# EAGLE board Guitar Amp (EAGLE 9.6.2)
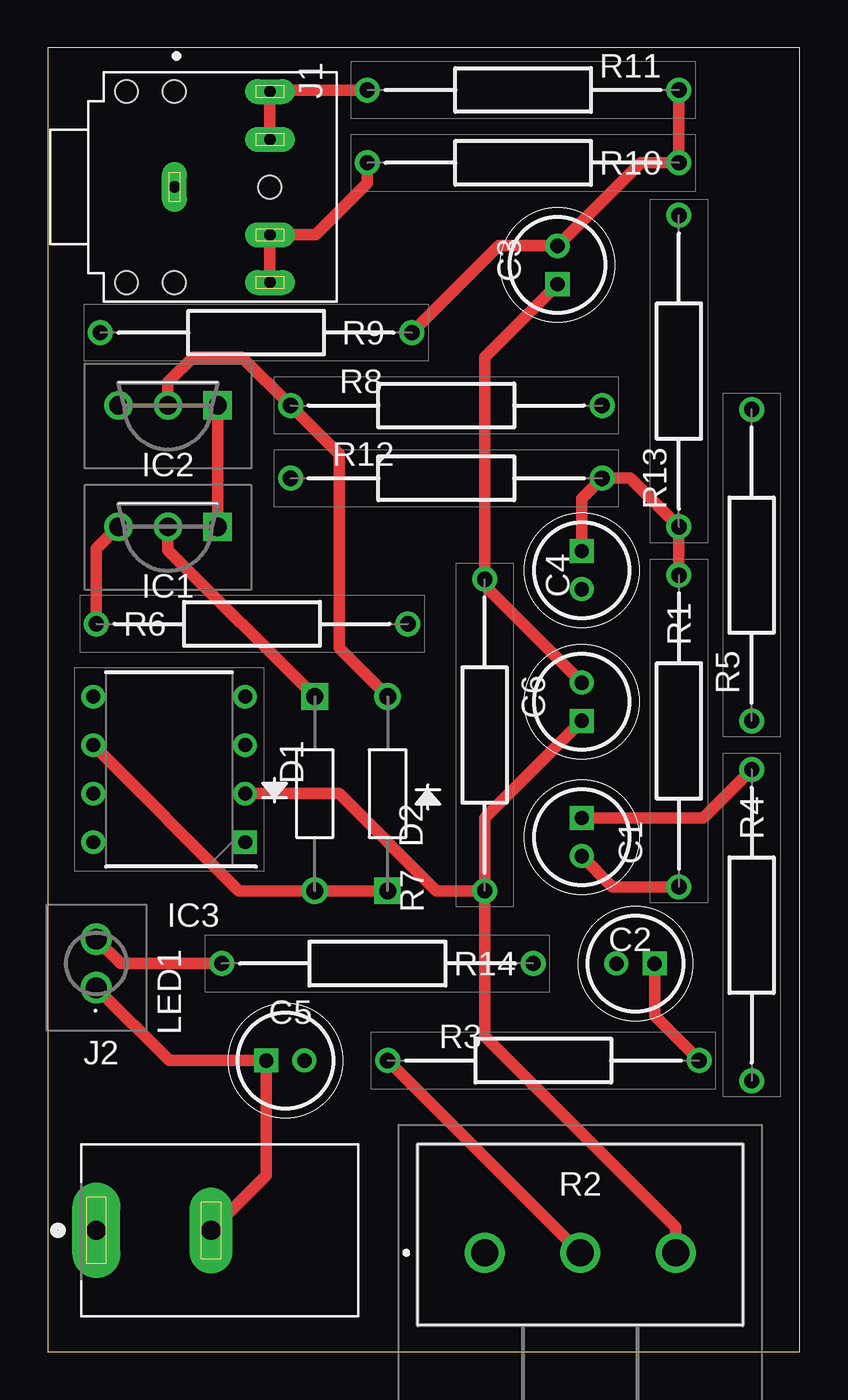
[diagram p0: board, top side]
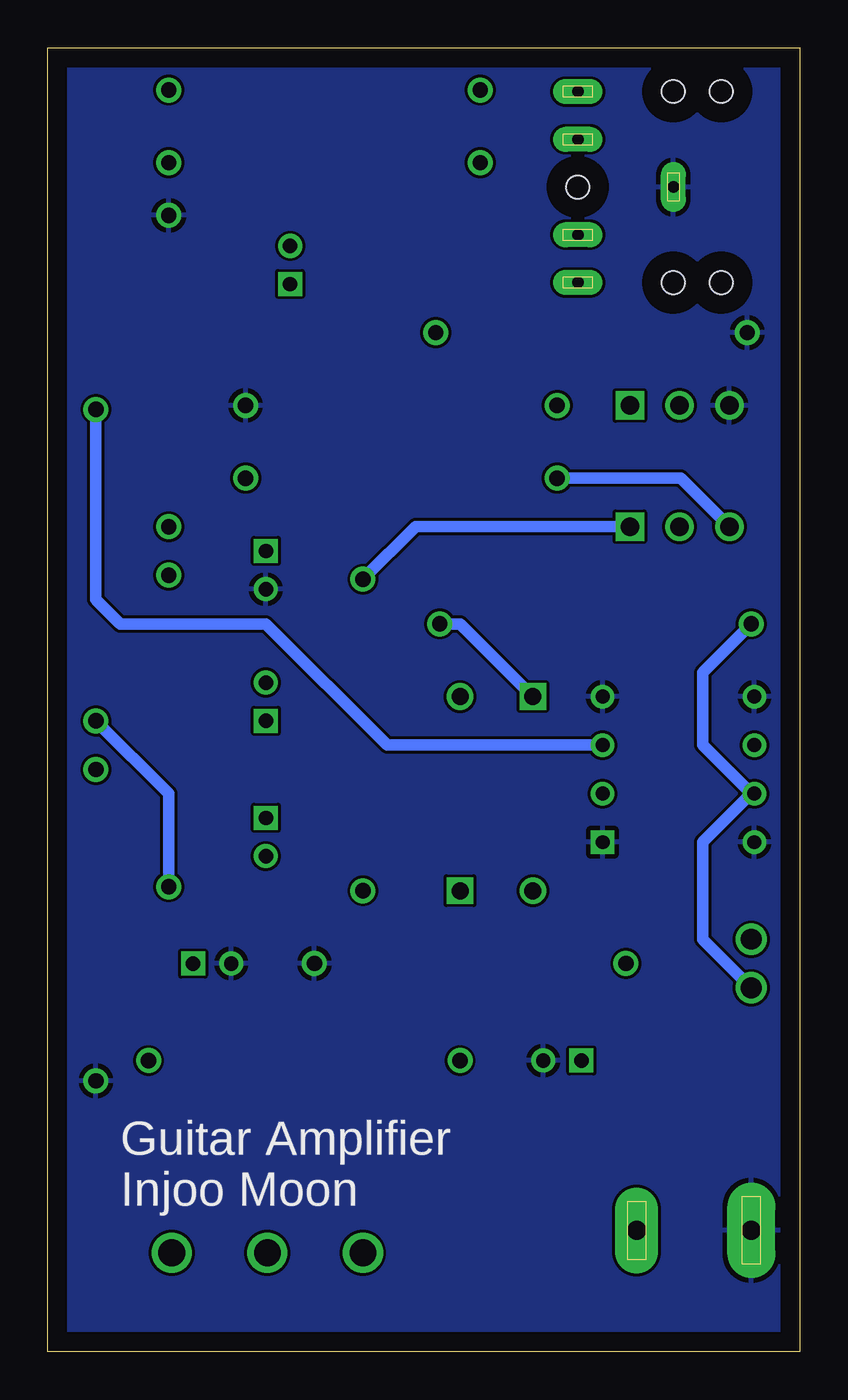
[diagram p1: board, bottom side, seen from below]

Size 39.35 x 68.25 mm. Coordinates in mm from the lower left corner, seen from the top.
Outline: 0,0 39.35,0 39.35,68.25 0,68.25 0,0
Copper layers (1*16): Top 0.035mm / dielectric 1.5mm / Bottom 0.035mm
Design rules "default": minimum track width 6mil, minimum drill 0.35mm, track to track 6mil, track to pad 6mil, pad to pad 6mil, via to via 6mil, smd to smd 6mil, copper to edge 40mil, drill to drill 6mil, minimum pad ring 10mil, minimum via ring 8mil, stop-mask expansion 4mil, vias tented up to drill 0mil, thermal gap 10mil

## Footprints (pad centres in the part's own frame; a part is rotated, then mirrored left to right if it is on the bottom)
CAPPRD200W55D500H1200 = drill 0.75 pad 1.15 square: 1 0,0 | drill 0.75 pad 1.15: 2 2,0
DIO_1N914 = drill 0.889 pad 1.333: 1 -10.16,0 | drill 0.889 pad 1.333 square: 2 0,0
KA431AZTA = drill 0.96 pad 1.493 square: 1 0,0 | drill 0.96 pad 1.493: 2 2.6,0; 3 5.2,0
DIP794W53P254L959H508Q8N = drill 0.73 pad 1.13 square: 1 -3.97,3.81 | drill 0.73 pad 1.13: 2 -3.97,1.27; 3 -3.97,-1.27; 4 -3.97,-3.81; 5 3.97,-3.81; 6 3.97,-1.27; 7 3.97,1.27; 8 3.97,3.81
SWITCHCRAFT_35RAPC4BHN2 = drill 0.6 pad 1.3 long: 1 0,-1; 2 5,4; 3 -5,4; 10 2.5,4; 11 -2.5,4 | hole 1.2: 0,4; -5,-1; -5,-3.5; 5,-1; 5,-3.5
CUI_PJ-037A = drill 1 pad 2.5 long: 1 0,0 | drill 1 pad 2.25 long: 2 6,0
TLHR4400AS12Z = drill 1.09 pad 1.635: 1 0,0; 2 2.54,0
RESAD1630W60L710D230 = drill 0.8 pad 1.2: 1 0,0; 2 16.3,0
P160KN0QD15B1MEG = drill 1.4 pad 2.1: 1 0,0.1; 2 5,0.1; 3 10,0.1

## Placement (x,y rotation side)
C1  0.1uF  [CAPPRD200W55D500H1200]  27.94,27.94 270 top
C2  4.7uF  [CAPPRD200W55D500H1200]  31.75,20.32 180 top
C3  47uF  [CAPPRD200W55D500H1200]  26.67,55.88 90 top
C4  47uF  [CAPPRD200W55D500H1200]  27.94,41.91 270 top
C5  47uF  [CAPPRD200W55D500H1200]  11.43,15.24 0 top
C6  150pF  [CAPPRD200W55D500H1200]  27.94,33.02 90 top
D1  1N914  [DIO_1N914]  13.97,34.29 90 top
D2  1N914  [DIO_1N914]  17.78,24.13 270 top
IC1  2N4401TA  [KA431AZTA]  8.89,43.18 180 top
IC2  2N4403BU  [KA431AZTA]  8.89,49.53 180 top
IC3  TL071CP  [DIP794W53P254L959H508Q8N]  6.35,30.48 180 top
J1  35RAPC4BHN2  [SWITCHCRAFT_35RAPC4BHN2]  7.62,60.96 270 top
J2  PJ-037A  [CUI_PJ-037A]  2.54,6.35 0 top
LED1  [TLHR4400AS12Z]  2.54,19.05 90 top
R1  10M  [RESAD1630W60L710D230]  33.02,40.64 270 top
R2  500k  [P160KN0QD15B1MEG]  22.86,5.08 0 top
R3  4.7k  [RESAD1630W60L710D230]  17.78,15.24 0 top
R4  22M  [RESAD1630W60L710D230]  36.83,30.48 270 top
R5  1k  [RESAD1630W60L710D230]  36.83,33.02 90 top
R6  3.9k  [RESAD1630W60L710D230]  2.54,38.1 0 top
R7  56k  [RESAD1630W60L710D230]  22.86,24.13 90 top
R8  3.9k  [RESAD1630W60L710D230]  12.7,49.53 0 top
R9  10k  [RESAD1630W60L710D230]  19.05,53.34 180 top
R10  100  [RESAD1630W60L710D230]  33.02,62.23 180 top
R11  100  [RESAD1630W60L710D230]  33.02,66.04 180 top
R12  10k  [RESAD1630W60L710D230]  12.7,45.72 0 top
R13  10k  [RESAD1630W60L710D230]  33.02,43.18 90 top
R14  1k  [RESAD1630W60L710D230]  25.4,20.32 180 top

## Library data of the parts
C1-C6 = SamacSys_Parts; DESCRIPTION: Panasonic Aluminium Electrolytic Capacitor 47uF 16V dc 5mm M Series Aluminium, Through Hole Electrolytic, +/-20%; HEIGHT: 12mm; MANUFACTURER_NAME: Panasonic; MANUFACTURER_PART_NUMBER: ECA-1CM470; MOUSER_PART_NUMBER: 667-ECA-1CM470; MOUSER_PRICE-STOCK: https://www.mouser.co.uk/ProductDetail/Panasonic/ECA-1CM470?qs=IZwnMEax2bpYVJNncOR8yw%3D%3D
D1 D2 = SamacSys_Parts; DESCRIPTION: Small Signal Diode; HEIGHT: mm; MANUFACTURER_NAME: ON Semiconductor; MANUFACTURER_PART_NUMBER: 1N914; MOUSER_PART_NUMBER: 512-1N914; MOUSER_PRICE-STOCK: https://www.mouser.co.uk/ProductDetail/ON-Semiconductor-Fairchild/1N914?qs=NSEUUqpg2uCfNuQFcxVZsA%3D%3D
IC1 = SamacSys_Parts; DESCRIPTION: NPN General Purpose Amplifier; HEIGHT: 5.33mm; MANUFACTURER_NAME: ON Semiconductor; MANUFACTURER_PART_NUMBER: 2N4401TA; MOUSER_PART_NUMBER: 512-2N4401TA; MOUSER_PRICE-STOCK: https://www.mouser.co.uk/ProductDetail/ON-Semiconductor-Fairchild/2N4401TA?qs=TWXTHIu%252B82ksHkuFc6gueQ%3D%3D
IC2 = SamacSys_Parts; DESCRIPTION: PNP General Purpose Amplifier; HEIGHT: 5.33mm; MANUFACTURER_NAME: ON Semiconductor; MANUFACTURER_PART_NUMBER: 2N4403BU; MOUSER_PART_NUMBER: 512-2N4403BU; MOUSER_PRICE-STOCK: https://www.mouser.co.uk/ProductDetail/ON-Semiconductor-Fairchild/2N4403BU?qs=hXzPkG2nhVb8OEuSUeGhQw%3D%3D
IC3 = SamacSys_Parts; DESCRIPTION: Low-Noise JFET-Input General-Purpose Operational Amplifier; HEIGHT: 5.08mm; MANUFACTURER_NAME: Texas Instruments; MANUFACTURER_PART_NUMBER: TL071CP; MOUSER_PART_NUMBER: 595-TL071CP; MOUSER_PRICE-STOCK: https://www.mouser.co.uk/ProductDetail/Texas-Instruments/TL071CP?qs=3FVjRv9mUZ%2FN1XJT5coqUQ%3D%3D
J1 = 35RAPC4BHN2; DESCRIPTION: Conn 3.5MM Stereo Jack F 5 POS Solder RA Thru-Hole 5 Terminal 1 Port; DIGI-KEY_PART_NUMBER: SC1459-ND; DIGI-KEY_PURCHASE_URL: https://www.digikey.com/product-detail/en/switchcraft-inc/35RAPC4BHN2/SC1459-ND/1288690?utm_source=snapeda&utm_medium=aggregator&utm_campaign=symbol; MF: Switchcraft; MP: 35RAPC4BHN2; PACKAGE: None
J2 = PJ-037A; AVAILABILITY: Good; CUI_PURCHASE_URL: https://www.cuidevices.com/product/interconnect/connectors/dc-power-connectors/jacks/pj-037a?utm_source=snapeda.com&utm_medium=referral&utm_campaign=snapedaBOM; DESCRIPTION: 2.0 x 6.5 mm, 2.5 A, Horizontal, Through Hole, Dc Power Jack Connector; DIGIKEY-PURCHASE-URL: https://snapeda.com/shop?store=DigiKey&id=493699; MF: CUI Devices; MOUSER-PURCHASE-URL: https://snapeda.com/shop?store=Mouser&id=493699; MP: PJ-037A; PACKAGE: None; PRICE: None
LED1 = SamacSys_Parts; DESCRIPTION: Standard LEDs - Through Hole Red 13mcd; 3mm 612-625nm; 2V Typ; HEIGHT: 6.1mm; MANUFACTURER_NAME: Vishay; MANUFACTURER_PART_NUMBER: TLHR4400-AS12Z; MOUSER_PART_NUMBER: 78-TLHR4400-AS12Z; MOUSER_PRICE-STOCK: https://www.mouser.co.uk/ProductDetail/Vishay-Semiconductors/TLHR4400-AS12Z?qs=nQ9vpdMXC6AwxmxsGskxgg%3D%3D
R1 R3-R14 = SamacSys_Parts; DESCRIPTION: Metal Film Resistors - Through Hole 1/4 WATT 10K OHM 5%; HEIGHT: mm; MANUFACTURER_NAME: KOA Speer; MANUFACTURER_PART_NUMBER: MF1/4LCT52R103J; MOUSER_PART_NUMBER: 660-MF1/4LCT52R103J; MOUSER_PRICE-STOCK: https://www.mouser.com/Search/Refine.aspx?Keyword=660-MF1%2F4LCT52R103J
R2 = SamacSys_Parts; DESCRIPTION: Potentiometers 16mm Rotary Panel Potentiometer; HEIGHT: 16.5mm; MANUFACTURER_NAME: TT Electronics/BI Magnetics; MANUFACTURER_PART_NUMBER: P160KN-0QC15A500K

## Nets
4.5V: C4.1 R1.1 R12.2 R13.1
9V: C5.1 IC1.3 IC3.7 J2.2 LED1.1 R6.1 R12.1
GND: C2.2 C4.2 C5.2 IC2.3 IC3.1 IC3.4 IC3.5 IC3.8 J1.1 J2.1 R4.2 R8.2 R9.2 R13.2 R14.1
IN: C1.1 R4.1
N$1: LED1.2 R14.2
N$2: C6.1 IC3.2 R2.3 R7.1
N$3: C1.2 R1.2 R5.1
N$4: IC3.3 R5.2
N$5: R2.2 R3.1
N$6: C2.1 R3.2
N$7: D1.1 D2.2 IC3.6
N$8: D1.2 IC1.2 R6.2
N$9: D2.1 IC2.2 R8.1
N$10: C3.1 C6.2 IC1.1 IC2.1 R7.2
N$11: C3.2 R9.1 R10.1 R11.1
N$12: J1.2 J1.10 R10.2
N$13: J1.3 J1.11 R11.2

## Tracks (layer width: path | path; a pad name or v marks a point on that pad's centre or on a via)
4.5V
  Top 0.61: R1.1 R13.1 30.48,45.72 R12.2 27.94,44.66 C4.1
9V
  Top 0.61: J2.2 11.43,9.24 C5.1 6.35,15.24 LED1.1 | R6.1 2.54,42.03 IC1.3
  Bottom 0.61: IC1.3 6.23,45.72 R12.1 | R6.1 5.08,35.56 5.08,31.75 2.54,29.21 | 2.54,29.21 IC3.7 | LED1.1 5.08,21.59 5.08,26.67 2.54,29.21
GND
  pour Bottom: -1.27,-1.27 40.64,-1.27 40.64,71.12 -1.27,71.12
IN
  Top 0.61: C1.1 34.29,27.94 R4.1
N$1
  Top 0.61: LED1.2 3.81,20.32 R14.2
N$2
  Top 0.61: R2.3 32.86,6.51 22.86,16.51 R7.1 | C6.1 22.86,27.94 R7.1 | IC3.2 15.24,29.21 20.32,24.13 R7.1
N$3
  Top 0.61: R1.2 29.54,24.34 C1.2
  Bottom 0.61: R5.1 33.02,29.21 R1.2
N$4
  Bottom 0.61: IC3.3 21.59,31.75 27.94,38.1 35.56,38.1 36.83,39.37 R5.2
N$5
  Top 0.61: R2.2 17.8,15.24 R3.1
N$6
  Top 0.61: R3.2 31.75,17.57 C2.1
N$7
  Top 0.61: D2.2 D1.1 10,24.13 IC3.6
N$8
  Top 0.61: IC1.2 6.29,41.97 D1.2
  Bottom 0.61: D1.2 17.78,38.1 R6.2
N$9
  Top 0.61: D2.1 15.24,36.83 15.24,46.99 R8.1 10.16,52.07 7.62,52.07 6.29,50.74 IC2.2
N$10
  Top 0.61: IC1.1 IC2.1 | C6.2 22.86,40.1 R7.2 22.86,52.07 C3.1
  Bottom 0.61: IC1.1 20.11,43.18 R7.2
N$11
  Top 0.61: R11.1 R10.1 31.02,62.23 C3.2 23.59,57.88 R9.1
N$12
  Top 0.61: J1.2 J1.10 14.01,58.46 16.72,61.17 R10.2
N$13
  Top 0.61: J1.11 J1.3 11.7,66.04 R11.2

## Text on the board
bPlace: Guitar Amplifier / Injoo Moon